# EAGLE board AM3352-SOM-EVB_Rev_D Kopie (EAGLE 7.2.0)
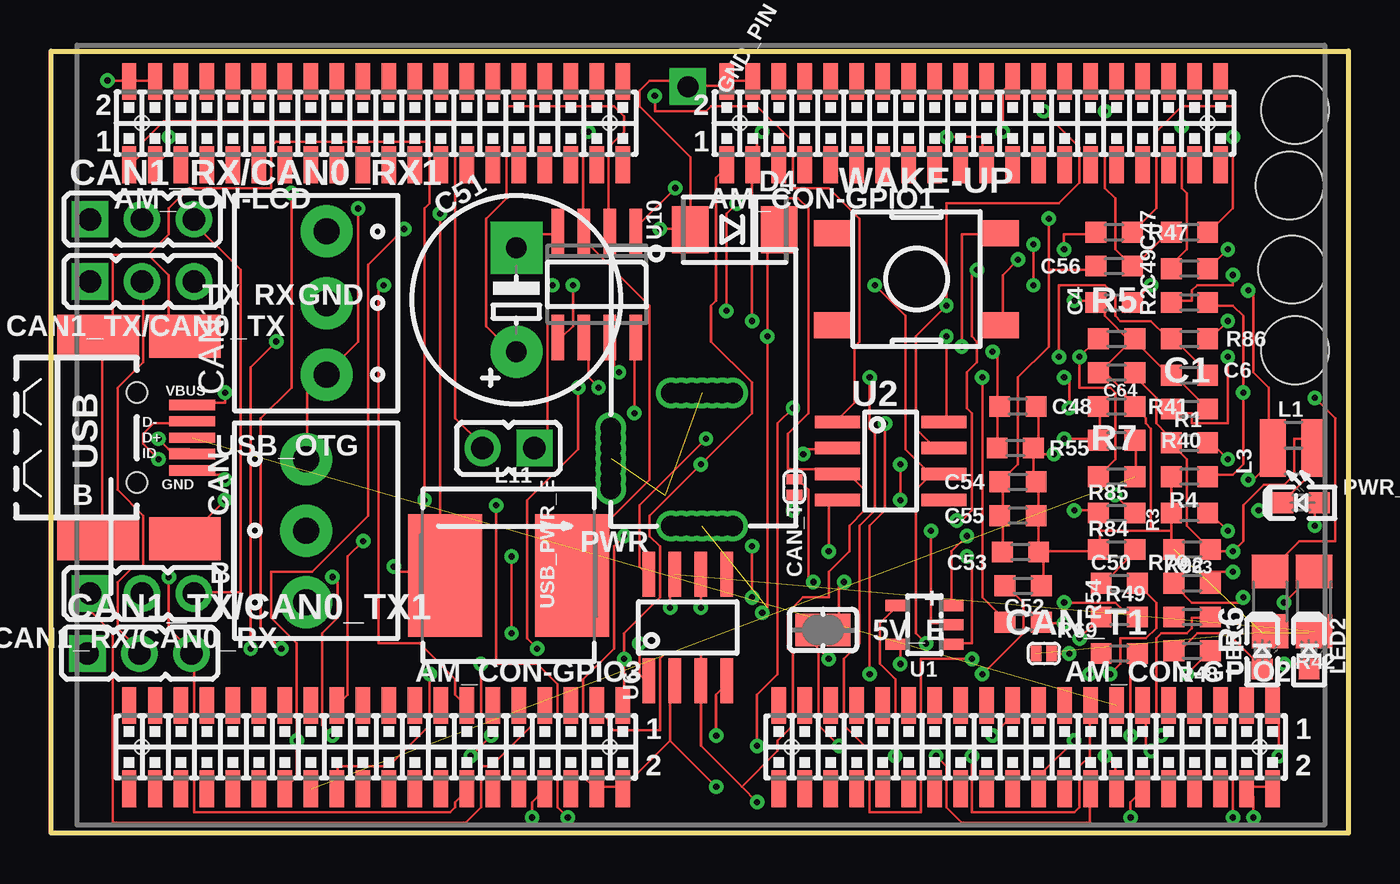
[diagram p0: board, top side]
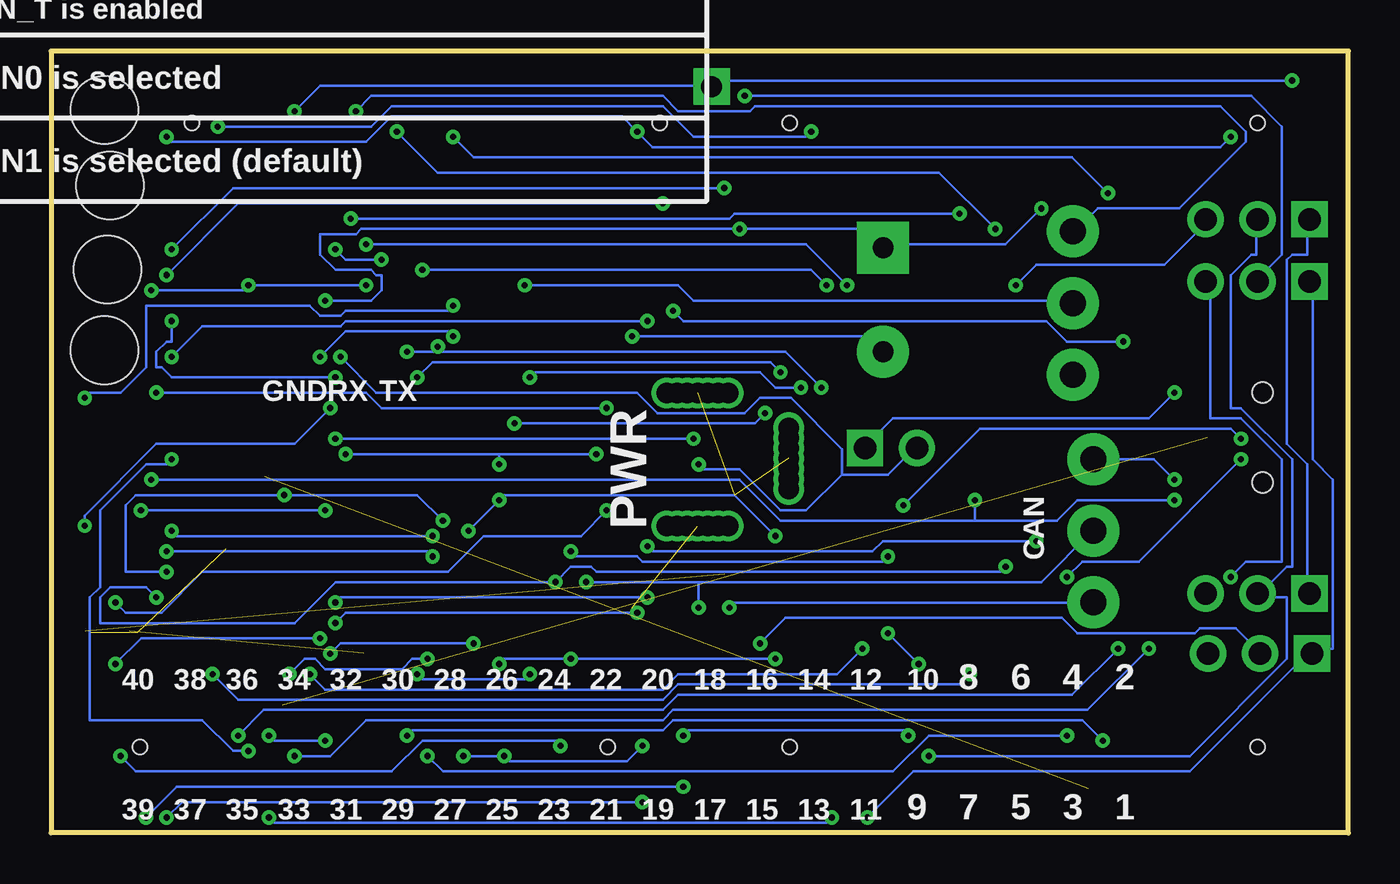
[diagram p1: board, bottom side, seen from below]

Size 63.39 x 38.18 mm. Coordinates in mm from the lower left corner, seen from the top.
Outline: 0,0 63.39,0 63.39,38.18 0,38.18 0,0
Copper layers (1+16): Top 0.035mm / dielectric 1.5mm / Bottom 0.035mm
Design rules "default": minimum track width 5mil, minimum drill 0.3mm, track to track 5mil, track to pad 5mil, pad to pad 5mil, via to via 5mil, smd to smd 1mil, copper to edge 10mil, drill to drill 8mil, minimum pad ring 8mil, minimum via ring 8mil, stop-mask expansion 4mil, vias tented up to drill 25mil, thermal gap 20mil
Net classes: 2 lan_sh: clearance 0.762 mm
Holes 3.3 mm at 60.78,23.57 60.65,27.51 60.52,31.63 60.78,35.31

## Footprints (pad centres in the part's own frame; a part is rotated, then mirrored left to right if it is on the bottom)
SJ-CLOSE = smd 1.168 x 1.6: 1 -0.762,0; 2 0.762,0
AM3352-SOM-EVB = smd 0.7 x 1.8: 1-1 -27.94,13.208; 1-2 -27.94,17.272; 1-3 -26.67,13.208; 1-4 -26.67,17.272; 1-5 -25.4,13.208; 1-6 -25.4,17.272; 1-7 -24.13,13.208; 1-8 -24.13,17.272; 1-9 -22.86,13.208; 1-10 -22.86,17.272; 1-11 -21.59,13.208; 1-12 -21.59,17.272; 1-13 -20.32,13.208; 1-14 -20.32,17.272; 1-15 -19.05,13.208; 1-16 -19.05,17.272; 1-17 -17.78,13.208; 1-18 -17.78,17.272; 1-19 -16.51,13.208; 1-20 -16.51,17.272; 1-21 -15.24,13.208; 1-22 -15.24,17.272; 1-23 -13.97,13.208; 1-24 -13.97,17.272; 1-25 -12.7,13.208; 1-26 -12.7,17.272; 1-27 -11.43,13.208; 1-28 -11.43,17.272; 1-29 -10.16,13.208; 1-30 -10.16,17.272; 1-31 -8.89,13.208; 1-32 -8.89,17.272; 1-33 -7.62,13.208; 1-34 -7.62,17.272; 1-35 -6.35,13.208; 1-36 -6.35,17.272; 1-37 -5.08,13.208; 1-38 -5.08,17.272; 1-39 -3.81,13.208; 1-40 -3.81,17.272; 2-1 1.27,13.208; 2-2 1.27,17.272; 2-3 2.54,13.208; 2-4 2.54,17.272; 2-5 3.81,13.208; 2-6 3.81,17.272; 2-7 5.08,13.208; 2-8 5.08,17.272; 2-9 6.35,13.208; 2-10 6.35,17.272; 2-11 7.62,13.208; 2-12 7.62,17.272; 2-13 8.89,13.208; 2-14 8.89,17.272; 2-15 10.16,13.208; 2-16 10.16,17.272; 2-17 11.43,13.208; 2-18 11.43,17.272; 2-19 12.7,13.208; 2-20 12.7,17.272; 2-21 13.97,13.208; 2-22 13.97,17.272; 2-23 15.24,13.208; 2-24 15.24,17.272; 2-25 16.51,13.208; 2-26 16.51,17.272; 2-27 17.78,13.208; 2-28 17.78,17.272; 2-29 19.05,13.208; 2-30 19.05,17.272; 2-31 20.32,13.208; 2-32 20.32,17.272; 2-33 21.59,13.208; 2-34 21.59,17.272; 2-35 22.86,13.208; 2-36 22.86,17.272; 2-37 24.13,13.208; 2-38 24.13,17.272; 2-39 25.4,13.208; 2-40 25.4,17.272; 3-1 27.94,-13.208; 3-2 27.94,-17.272; 3-3 26.67,-13.208; 3-4 26.67,-17.272; 3-5 25.4,-13.208; 3-6 25.4,-17.272; 3-7 24.13,-13.208; 3-8 24.13,-17.272; 3-9 22.86,-13.208; 3-10 22.86,-17.272; 3-11 21.59,-13.208; 3-12 21.59,-17.272; 3-13 20.32,-13.208; 3-14 20.32,-17.272; 3-15 19.05,-13.208; 3-16 19.05,-17.272; 3-17 17.78,-13.208; 3-18 17.78,-17.272; 3-19 16.51,-13.208; 3-20 16.51,-17.272; 3-21 15.24,-13.208; 3-22 15.24,-17.272; 3-23 13.97,-13.208; 3-24 13.97,-17.272; 3-25 12.7,-13.208; 3-26 12.7,-17.272; 3-27 11.43,-13.208; 3-28 11.43,-17.272; 3-29 10.16,-13.208; 3-30 10.16,-17.272; 3-31 8.89,-13.208; 3-32 8.89,-17.272; 3-33 7.62,-13.208; 3-34 7.62,-17.272; 3-35 6.35,-13.208; 3-36 6.35,-17.272; 3-37 5.08,-13.208; 3-38 5.08,-17.272; 3-39 3.81,-13.208; 3-40 3.81,-17.272; 4-1 -3.81,-13.208; 4-2 -3.81,-17.272; 4-3 -5.08,-13.208; 4-4 -5.08,-17.272; 4-5 -6.35,-13.208; 4-6 -6.35,-17.272; 4-7 -7.62,-13.208; 4-8 -7.62,-17.272; 4-9 -8.89,-13.208; 4-10 -8.89,-17.272; 4-11 -10.16,-13.208; 4-12 -10.16,-17.272; 4-13 -11.43,-13.208; 4-14 -11.43,-17.272; 4-15 -12.7,-13.208; 4-16 -12.7,-17.272; 4-17 -13.97,-13.208; 4-18 -13.97,-17.272; 4-19 -15.24,-13.208; 4-20 -15.24,-17.272; 4-21 -16.51,-13.208; 4-22 -16.51,-17.272; 4-23 -17.78,-13.208; 4-24 -17.78,-17.272; 4-25 -19.05,-13.208; 4-26 -19.05,-17.272; 4-27 -20.32,-13.208; 4-28 -20.32,-17.272; 4-29 -21.59,-13.208; 4-30 -21.59,-17.272; 4-31 -22.86,-13.208; 4-32 -22.86,-17.272; 4-33 -24.13,-13.208; 4-34 -24.13,-17.272; 4-35 -25.4,-13.208; 4-36 -25.4,-17.272; 4-37 -26.67,-13.208; 4-38 -26.67,-17.272; 4-39 -27.94,-13.208; 4-40 -27.94,-17.272 | hole 0.7: -27.305,15.24; -4.445,15.24; 1.905,15.24; 24.765,15.24; 27.305,-15.24; 4.445,-15.24; -4.445,-15.24; -27.305,-15.24
C0603_DWS = smd 1.016 x 1.016: 1 -0.889,0; 2 0.889,0
E5-10,5 = drill 1.016 pad 2.54: + -2.54,0 | drill 1.016 pad 2.54 square: - 2.54,0
CON3/3.5MM = drill 1.27 pad 2.54: 1 -1.75,-0.5; 2 1.75,-0.5; 3 5.25,-0.5
JP2 = drill 1.1 pad 1.778 square: 1 -2.54,0 | drill 1.1 pad 1.778: 2 0,0; 3 2.54,0
SJ_1_SMALLER = smd 0.508 x 0.762: 1 -0.381,0; 2 0.381,0
DO214AA = smd 1.778 x 2.286: A 2.177,0; C -2.177,0
FIDUCIAL-1X3 = smd 1 x 1: 1 0,0
TEST_PAD40/70/SQUARE = drill 1.016 pad 1.778 square: P$1 0,0
L0805_5MIL_DWS = smd 1.27 x 1.524: 1 -1.016,0; 2 1.016,0
8X8MM_3131 = smd 3.6 x 6: 1 -3.1,0; 2 3.1,0
LED_0603 = smd 1.016 x 1.016: A 0.889,0; C -0.889,0
PWR_JACK_UNI_MILLING = drill 1: + 0,4.75; +1 0,5.25; +2 0,5.75; +3 0,6.25; +4 0,4.25; +5 0,3.75; +6 0,3.25; - -6.5,4.75; -1 -6.5,5.25; -2 -6.5,5.75; -3 -6.5,4.25; -4 -6.5,3.75; -5 -6.5,6.25; -6 -6.5,3.25; -- -3.3,0.3; --1 -3.8,0.3; --2 -4.3,0.3; --3 -4.8,0.3; --4 -2.8,0.3; --5 -2.3,0.3; --6 -1.8,0.3
LED-0603 = smd 1.016 x 1.016: A 0.889,0; C -0.889,0
R0603_5MIL_DWS = smd 1.016 x 1.016: 1 -0.889,0; 2 0.889,0
R1206_5MIL_WS = smd 1.651 x 1.778: 1 -1.46,0; 2 1.46,0
SOT23-5 = smd 1.2 x 0.55: 1 1.3,-0.95; 2 1.3,0; 3 1.3,0.95; 4 -1.3,0.95; 5 -1.3,-0.95
SO-08 = smd 0.6 x 2.2: 1 -1.905,-2.6; 2 -0.635,-2.6; 3 0.635,-2.6; 4 1.905,-2.6; 5 1.905,2.6; 6 0.635,2.6; 7 -0.635,2.6; 8 -1.905,2.6
SOIC8 = smd 0.6 x 2.2: 1 -1.905,-2.6; 2 -0.635,-2.6; 3 0.635,-2.6; 4 1.905,-2.6; 5 1.905,2.6; 6 0.635,2.6; 7 -0.635,2.6; 8 -1.905,2.6
USB_MINI_9PIN = smd 2.25 x 0.5: D+ 2.706,0; D- 2.706,0.8; GND 2.706,-1.6; ID 2.706,-0.8; VBUS 2.706,1.6 | smd 4 x 2.1: GND1 -1.9,4.95; GND3 -1.9,-4.95 | smd 3.5 x 2.1: GND2 2.35,4.95; GND4 2.35,-4.95 | hole 1: 0,2.2; 0,-2.2
JP1 = drill 1.1 pad 1.778 square: 1 0,-1.27 | drill 1.1 pad 1.778: 2 0,1.27
T1157 = smd 1.27 x 1.905: 1 -2.25,4.054; 2 2.25,4.054; 3 2.25,-4.054; 4 -2.25,-4.054

## Placement (x,y rotation side)
5V_E  Close  [SJ-CLOSE]  37.72,9.91 180 top
AM3352-SOM-EVB-PLATFORM  4XGPH127SMT-02X20(PA-V16X-2X20-LF)  [AM3352-SOM-EVB]  31.75,19.43 0 top
C1  100nF  [C0603_DWS]  55.63,20.7 0 top
C4  100nF  [C0603_DWS]  51.94,25.91 180 top
C6  100nF  [C0603_DWS]  55.63,22.35 180 top
C47  100nF  [C0603_DWS]  55.63,29.34 180 top
C48  100nF  [C0603_DWS]  47.24,20.83 0 top
C49  10nF  [C0603_DWS]  55.63,27.56 180 top
C50  3.3nF  [C0603_DWS]  52.2,12.19 180 top
C51  470uF/25V/LOWESR/105C  [E5-10,5]  22.73,26.04 90 top
C52  100nF  [C0603_DWS]  47.5,12.06 0 top
C53  22uF/6.3V  [C0603_DWS]  47.37,13.72 0 top
C54  22uF/6.3V  [C0603_DWS]  47.24,17.14 0 top
C55  22uF/6.3V  [C0603_DWS]  47.24,15.49 0 top
C56  22uF/6.3V  [C0603_DWS]  51.94,27.69 0 top
C63  22uF/6.3V  [C0603_DWS]  55.75,13.84 180 top
C64  22uF/6.3V  [C0603_DWS]  52.07,22.48 180 top
CAN  TB3-3.5mm  [CON3/3.5MM]  12.95,16.51 270 top
CAN1  TB3-3.5mm  [CON3/3.5MM]  12.95,24.13 90 top
CAN1_RX/CAN0_RX  HN1x3(CAN1_RX:Close/CAN0_RX:Open)  [JP2]  4.45,11.68 0 top
CAN1_RX/CAN0_RX1  HN1x3(CAN1_RX:Close/CAN0_RX:Open)  [JP2]  4.45,29.97 0 top
CAN1_TX/CAN0_TX  HN1x3(CAN1_TX:Close/CAN0_TX:Open)  [JP2]  4.45,26.92 0 top
CAN1_TX/CAN0_TX1  HN1x3(CAN1_TX:Close/CAN0_TX:Open)  [JP2]  4.32,8.76 0 top
CAN_T  Open  [SJ_1_SMALLER]  36.32,16.89 90 top
CAN_T1  Open  [SJ_1_SMALLER]  48.51,8.76 0 top
D4  SMBJ16A  [DO214AA]  33.4,29.46 180 top
FID1  FIDUCIAL  [FIDUCIAL-1X3]  60.58,31.62 180 top
FID2  FIDUCIAL  [FIDUCIAL-1X3]  60.58,35.31 180 top
FID3  FIDUCIAL  [FIDUCIAL-1X3]  60.71,27.3 180 top
GND_PIN  TESTPAD3  [TEST_PAD40/70/SQUARE]  31.11,36.45 180 top
L1  FB0805/600R/2A  [L0805_5MIL_DWS]  60.71,19.43 0 top
L3  FB0805/600R/200mA(201209-601)  [L0805_5MIL_DWS]  60.71,18.16 180 top
L11  10uH/3.15A/20%  [8X8MM_3131]  22.35,12.57 180 top
LED2  LED/Red/0603  [LED_0603]  61.47,8.89 270 top
LED3  LED/Yellow/0603  [LED_0603]  59.18,8.89 270 top
PWR  YDJ-1136  [PWR_JACK_UNI_MILLING]  27.05,14.99 270 top
PWR_LED  LED/Red/0603  [LED-0603]  61.09,16.13 0 top
R1  2.2k/1%  [R0603_5MIL_DWS]  55.63,19.05 180 top
R2  NA  [R0603_5MIL_DWS]  55.63,25.91 180 top
R3  13k/1%  [R0603_5MIL_DWS]  55.63,15.62 0 top
R4  10k  [R0603_5MIL_DWS]  55.63,17.4 0 top
R5  10k  [R0603_5MIL_DWS]  52.07,24.13 0 top
R6  120R  [R1206_5MIL_WS]  59.56,11.3 90 top
R7  NA  [R0603_5MIL_DWS]  52.07,17.4 0 top
R40  NA  [R0603_5MIL_DWS]  52.07,19.18 0 top
R41  10k  [R0603_5MIL_DWS]  52.07,20.83 0 top
R42  120R  [R1206_5MIL_WS]  61.72,11.3 270 top
R47  2.2k/1%  [R0603_5MIL_DWS]  51.94,29.34 0 top
R48  2.2k/1%  [R0603_5MIL_DWS]  55.75,8.89 180 top
R49  2.2k/1%  [R0603_5MIL_DWS]  52.2,10.54 180 top
R54  49.9R/1%  [R0603_5MIL_DWS]  52.2,8.76 180 top
R55  NA  [R0603_5MIL_DWS]  47.12,18.8 0 top
R69  10k  [R0603_5MIL_DWS]  47.5,10.29 180 top
R70  4.99k/1%  [R0603_5MIL_DWS]  55.75,12.19 180 top
R84  2.2k/1%  [R0603_5MIL_DWS]  52.07,13.84 180 top
R85  1.05k/1%  [R0603_5MIL_DWS]  52.07,15.62 180 top
R86  2.2k/1%  [R0603_5MIL_DWS]  55.63,24.13 0 top
R92  0R  [R0603_5MIL_DWS]  55.75,10.54 0 top
U1  SY6280  [SOT23-5]  42.67,10.16 0 top
U2  SN65HVD230(SO8)  [SO-08]  41.02,18.16 270 top
U6  SN65HVD230(SO8)  [SO-08]  31.11,10.03 0 top
U10  MP1482DS  [SOIC8]  26.67,26.8 180 top
USB_OTG  USB-OTG  [USB_MINI_9PIN]  4.19,19.3 0 top
USB_PWR_E  HN1x2(Open)  [JP1]  22.35,18.8 90 top
WAKE-UP  T1157  [T1157]  42.29,27.05 270 top

## Library data of the parts
5V_E CAN1_RX/CAN0_RX CAN1_RX/CAN0_RX1 CAN1_TX/CAN0_TX CAN1_TX/CAN0_TX1 CAN_T CAN_T1 USB_PWR_E = jumper
AM3352-SOM-EVB-PLATFORM = OLIMEX_CASES
C1 C4 C6 C47-C56 C63 C64 L1 L3 R1-R7 R40-R42 R47-R49 R54 R55 R69 R70 R84-R86 R92 = rcl
CAN CAN1 LED2 LED3 PWR_LED = DOUBLE-SIDE
D4 L11 = OLIMEX_DISCRET
FID1-FID3 = SparkFunEagle-6-6-07
GND_PIN PWR WAKE-UP = gogo
U1 U10 = OLIMEX_IC
U2 U6 = arm
USB_OTG = OLIMEX_CONNECTORS

## Nets
+5V: 5V_E.2 AM3352-SOM-EVB-PLATFORM.1-1 AM3352-SOM-EVB-PLATFORM.2-1 AM3352-SOM-EVB-PLATFORM.3-1 AM3352-SOM-EVB-PLATFORM.4-1 C6.1 R86.1 U1.5 USB_PWR_E.2
+5V_OTG_PWR: C4.1 L1.1 USB_OTG.VBUS USB_PWR_E.1
AIN4: AM3352-SOM-EVB-PLATFORM.4-35
AIN5: AM3352-SOM-EVB-PLATFORM.4-37
AIN6: AM3352-SOM-EVB-PLATFORM.4-38
AIN7: AM3352-SOM-EVB-PLATFORM.4-36
CAN_RX: CAN1_RX/CAN0_RX1.2 CAN1_RX/CAN0_RX.2 U2.4 U6.4
CAN_TX: CAN1_TX/CAN0_TX1.2 CAN1_TX/CAN0_TX.2 U2.1 U6.1
CANH: CAN.3 R42.2 U6.7
CANH1: CAN1.3 R6.2 U2.7
CANL: CAN.2 CAN_T.2 U6.6
CANL1: CAN1.2 CAN_T1.2 U2.6
EXT_WAKEUP: AM3352-SOM-EVB-PLATFORM.3-20 R54.1
GND [PWR]: AM3352-SOM-EVB-PLATFORM.1-2 AM3352-SOM-EVB-PLATFORM.1-4 AM3352-SOM-EVB-PLATFORM.2-2 AM3352-SOM-EVB-PLATFORM.2-4 AM3352-SOM-EVB-PLATFORM.3-2 AM3352-SOM-EVB-PLATFORM.3-4 AM3352-SOM-EVB-PLATFORM.4-2 AM3352-SOM-EVB-PLATFORM.4-4 C1.2 C4.2 C6.2 C47.2 C48.2 C51.- C52.2 C53.2 C54.2 C55.2 C56.2 C63.2 C64.2 CAN1.1 CAN.1 D4.A GND_PIN.P$1 L3.1 LED2.C LED3.C PWR.- PWR.-- PWR_LED.C R3.1 R4.1 R5.2 R41.2 R55.2 R84.2 R85.2 U1.2 U2.2 U6.2 U10.4 USB_OTG.GND
GNDA: AM3352-SOM-EVB-PLATFORM.4-40
JTAG_TCK: AM3352-SOM-EVB-PLATFORM.4-29
JTAG_TDI: AM3352-SOM-EVB-PLATFORM.4-31
JTAG_TDO: AM3352-SOM-EVB-PLATFORM.4-33
JTAG_TMS: AM3352-SOM-EVB-PLATFORM.4-32
JTAG_TRST: AM3352-SOM-EVB-PLATFORM.4-30
LCD_BKL: AM3352-SOM-EVB-PLATFORM.1-36
LCD_LEFT/RIGHT: AM3352-SOM-EVB-PLATFORM.1-33
LCD_UP/DOWN: AM3352-SOM-EVB-PLATFORM.1-34
MMC0-SDCD#/EMU4: AM3352-SOM-EVB-PLATFORM.3-17
N$1: LED2.A R49.2
N$2: CAN_T1.1 R6.1
N$3: C51.+ D4.C PWR.+ R69.1 U10.2
N$4: C52.1 U10.8
N$5: R5.1 R7.1 U2.8
N$6: R69.2 U10.7
N$7: C49.1 U10.1
N$8: C49.2 L11.1 U10.3
N$9: C50.1 U10.6
N$11: C50.2 R84.1
N$12 [PWR]: 5V_E.1 C53.1 C54.1 C55.1 C56.1 L11.2 R70.2
N$13: AM3352-SOM-EVB-PLATFORM.2-21 R92.2
N$43: R47.1 WAKE-UP.2
N$44: C48.1 R54.2 R55.1 WAKE-UP.1
N$62: R70.1 R85.1 U10.5
N$80: R40.1 R41.1 U6.8
N$99: R3.2 U1.3
N$100: C63.1 C64.1 L1.2 R1.2 U1.1
N$129: PWR_LED.A R86.2
N$231: LED3.A R48.2
N$266: L3.2 USB_OTG.GND1 USB_OTG.GND2 USB_OTG.GND3 USB_OTG.GND4
N$566: CAN_T.1 R42.1
NNMI: AM3352-SOM-EVB-PLATFORM.3-22
P0_0/EMDIO: AM3352-SOM-EVB-PLATFORM.3-38
P0_1/EMDC: AM3352-SOM-EVB-PLATFORM.3-36
P0_2/SPI0_SCLK: AM3352-SOM-EVB-PLATFORM.4-11
P0_3/SPI0_D0(MISO): AM3352-SOM-EVB-PLATFORM.4-9
P0_4/SPI0_D1(MOSI): AM3352-SOM-EVB-PLATFORM.4-10
P0_5/SPI0_CS0: AM3352-SOM-EVB-PLATFORM.4-12
P0_7/PWM0_OUT: AM3352-SOM-EVB-PLATFORM.4-27
P0_8/LCD_D12: AM3352-SOM-EVB-PLATFORM.1-25
P0_9/LCD_D13: AM3352-SOM-EVB-PLATFORM.1-26
P0_10/LCD_D14: AM3352-SOM-EVB-PLATFORM.1-27
P0_11/LCD_D15: AM3352-SOM-EVB-PLATFORM.1-28
P0_12/I2C2_SDA: AM3352-SOM-EVB-PLATFORM.4-8 CAN1_TX/CAN0_TX1.1 CAN1_TX/CAN0_TX.1
P0_13/I2C2_SCL: AM3352-SOM-EVB-PLATFORM.4-7 CAN1_RX/CAN0_RX1.1 CAN1_RX/CAN0_RX.1
P0_14/UART1_RXD: AM3352-SOM-EVB-PLATFORM.4-6
P0_15/UART1_TXD: AM3352-SOM-EVB-PLATFORM.4-5
P0_16/ETXD3: AM3352-SOM-EVB-PLATFORM.3-29
P0_17/ETXD2: AM3352-SOM-EVB-PLATFORM.3-27
P0_19/EMU2: AM3352-SOM-EVB-PLATFORM.2-25
P0_20/EMU3: AM3352-SOM-EVB-PLATFORM.4-22
P0_21/ETXD1: AM3352-SOM-EVB-PLATFORM.3-25
P0_22/LCD_D23: AM3352-SOM-EVB-PLATFORM.1-21
P0_23/LCD_D22: AM3352-SOM-EVB-PLATFORM.1-13
P0_26/LCD_D21: AM3352-SOM-EVB-PLATFORM.1-5
P0_27/LCD_D20: AM3352-SOM-EVB-PLATFORM.1-22
P0_28/ETXD0: AM3352-SOM-EVB-PLATFORM.3-23
P0_29/EPHY-RST#/RFCLK: AM3352-SOM-EVB-PLATFORM.3-40
P0_30/NRB0/CRS: R92.1
P0_31/NWP/RXERR: AM3352-SOM-EVB-PLATFORM.2-32
P1_0/NDQ0: AM3352-SOM-EVB-PLATFORM.2-22
P1_1/NDQ1: AM3352-SOM-EVB-PLATFORM.2-20
P1_2/NDQ2: AM3352-SOM-EVB-PLATFORM.2-18
P1_3/NDQ3: AM3352-SOM-EVB-PLATFORM.2-16
P1_4/NDQ4: AM3352-SOM-EVB-PLATFORM.2-14
P1_5/NDQ5: AM3352-SOM-EVB-PLATFORM.2-12
P1_6/NDQ6: AM3352-SOM-EVB-PLATFORM.2-10
P1_7/NDQ7: AM3352-SOM-EVB-PLATFORM.2-8
P1_8/UART4_RXD: AM3352-SOM-EVB-PLATFORM.4-14 CAN1_TX/CAN0_TX1.3 CAN1_TX/CAN0_TX.3
P1_9/UART4_TXD: AM3352-SOM-EVB-PLATFORM.4-13 CAN1_RX/CAN0_RX1.3 CAN1_RX/CAN0_RX.3
P1_10/UART0_RX: AM3352-SOM-EVB-PLATFORM.2-5
P1_11/UART0_TX: AM3352-SOM-EVB-PLATFORM.2-7
P1_12/LCD_D19: AM3352-SOM-EVB-PLATFORM.1-14
P1_13/LCD_D18: AM3352-SOM-EVB-PLATFORM.1-6
P1_14/LCD_D17: AM3352-SOM-EVB-PLATFORM.1-23
P1_15/LCD_D16: AM3352-SOM-EVB-PLATFORM.1-7
P1_16/TXEN: AM3352-SOM-EVB-PLATFORM.2-30
P1_17/RXDV [PWR]: AM3352-SOM-EVB-PLATFORM.2-40
P1_18/EHRPWM1A/TXD3: AM3352-SOM-EVB-PLATFORM.2-38
P1_19/TXD2: AM3352-SOM-EVB-PLATFORM.2-36
P1_20/TXD1: AM3352-SOM-EVB-PLATFORM.2-34
P1_21/TXD0: AM3352-SOM-EVB-PLATFORM.2-39
P1_22/TXCLK: AM3352-SOM-EVB-PLATFORM.2-37
P1_23/RXCLK: AM3352-SOM-EVB-PLATFORM.2-35
P1_24/RXD3: AM3352-SOM-EVB-PLATFORM.2-33
P1_25/RXD2: AM3352-SOM-EVB-PLATFORM.2-29
P1_26/RXD1: AM3352-SOM-EVB-PLATFORM.2-31
P1_27/RXD0: AM3352-SOM-EVB-PLATFORM.2-27
P1_28/ECOL: AM3352-SOM-EVB-PLATFORM.2-23
P1_29/NCE0: AM3352-SOM-EVB-PLATFORM.2-17
P1_30/NCE1/LCD_U/D: AM3352-SOM-EVB-PLATFORM.2-15
P1_31/NDQS: AM3352-SOM-EVB-PLATFORM.2-6
P2_0/LCD_L/R: AM3352-SOM-EVB-PLATFORM.2-26
P2_1/NRB1: AM3352-SOM-EVB-PLATFORM.2-28
P2_2/NALE: AM3352-SOM-EVB-PLATFORM.2-11
P2_3/NRE: AM3352-SOM-EVB-PLATFORM.2-19
P2_4/NWE: AM3352-SOM-EVB-PLATFORM.2-9
P2_5/NCLE: AM3352-SOM-EVB-PLATFORM.2-13
P2_6/LCD_D0: AM3352-SOM-EVB-PLATFORM.1-8
P2_7/LCD_D1: AM3352-SOM-EVB-PLATFORM.1-9
P2_8/LCD_D2: AM3352-SOM-EVB-PLATFORM.1-10
P2_9/LCD_D3: AM3352-SOM-EVB-PLATFORM.1-11
P2_10/LCD_D4: AM3352-SOM-EVB-PLATFORM.1-12
P2_11/LCD_D5: AM3352-SOM-EVB-PLATFORM.1-15
P2_12/LCD_D6: AM3352-SOM-EVB-PLATFORM.1-16
P2_13/LCD_D7: AM3352-SOM-EVB-PLATFORM.1-17
P2_14/LCD_D8: AM3352-SOM-EVB-PLATFORM.1-18
P2_15/LCD_D9: AM3352-SOM-EVB-PLATFORM.1-19
P2_16/LCD_D10: AM3352-SOM-EVB-PLATFORM.1-20
P2_17/LCD_D11: AM3352-SOM-EVB-PLATFORM.1-24
P2_18/ERXD3: AM3352-SOM-EVB-PLATFORM.3-30
P2_19/ERXD2: AM3352-SOM-EVB-PLATFORM.3-28
P2_20/ERXD1: AM3352-SOM-EVB-PLATFORM.3-26
P2_21/ERXD0: AM3352-SOM-EVB-PLATFORM.3-24
P2_22/LCD_VSYNC: AM3352-SOM-EVB-PLATFORM.1-30
P2_23/LCD_HSYNC: AM3352-SOM-EVB-PLATFORM.1-29
P2_24/LCD_CLK: AM3352-SOM-EVB-PLATFORM.1-31
P2_25/LCD_DE: AM3352-SOM-EVB-PLATFORM.1-32
P3_0/ECOL: AM3352-SOM-EVB-PLATFORM.3-37
P3_1/ECRS: AM3352-SOM-EVB-PLATFORM.3-39
P3_2/ERXERR: AM3352-SOM-EVB-PLATFORM.3-35
P3_3/ETXEN: AM3352-SOM-EVB-PLATFORM.3-31
P3_4/ERXDV: AM3352-SOM-EVB-PLATFORM.3-32
P3_5/I2C0-SDA: AM3352-SOM-EVB-PLATFORM.4-16
P3_6/I2C0-SCL: AM3352-SOM-EVB-PLATFORM.4-15
P3_7/EMU0 [PWR]: AM3352-SOM-EVB-PLATFORM.4-25
P3_8/EMU1: AM3352-SOM-EVB-PLATFORM.4-26 R7.2 R40.2
P3_9/ETXCK: AM3352-SOM-EVB-PLATFORM.3-33
P3_10/ERXCK: AM3352-SOM-EVB-PLATFORM.3-34
P3_14/SPI1_CLK: AM3352-SOM-EVB-PLATFORM.4-19
P3_15/SPI1_D0(MISO): AM3352-SOM-EVB-PLATFORM.4-17
P3_16/SPI1_D1(MOSI): AM3352-SOM-EVB-PLATFORM.4-18
P3_17/SPI1_CS0: AM3352-SOM-EVB-PLATFORM.4-20
P3_18/LED1: AM3352-SOM-EVB-PLATFORM.4-21
P3_19/LCD_PWR_EN: AM3352-SOM-EVB-PLATFORM.1-35
P3_20/LED2: AM3352-SOM-EVB-PLATFORM.4-23 R49.1
P3_21/LED3: AM3352-SOM-EVB-PLATFORM.4-24 R48.1
PMIC_POWER_EN: AM3352-SOM-EVB-PLATFORM.3-18
SYS_RESETN: AM3352-SOM-EVB-PLATFORM.2-24 AM3352-SOM-EVB-PLATFORM.3-21 AM3352-SOM-EVB-PLATFORM.4-28
TPX1: AM3352-SOM-EVB-PLATFORM.1-37
TPX2: AM3352-SOM-EVB-PLATFORM.1-38
TPY1: AM3352-SOM-EVB-PLATFORM.1-39
TPY2: AM3352-SOM-EVB-PLATFORM.1-40
USB0-DRV: AM3352-SOM-EVB-PLATFORM.3-16 R2.1 R4.2 U1.4
USB0-ID: AM3352-SOM-EVB-PLATFORM.3-12 USB_OTG.ID
USB0-VBUS: AM3352-SOM-EVB-PLATFORM.3-11 R1.1
USB0_CE: AM3352-SOM-EVB-PLATFORM.3-14 R2.2
USB0_DM: AM3352-SOM-EVB-PLATFORM.3-15 USB_OTG.D-
USB0_DP: AM3352-SOM-EVB-PLATFORM.3-13 USB_OTG.D+
USB1-VBUS: AM3352-SOM-EVB-PLATFORM.3-5
USB1_CE: AM3352-SOM-EVB-PLATFORM.3-8
USB1_DM: AM3352-SOM-EVB-PLATFORM.3-9
USB1_DP: AM3352-SOM-EVB-PLATFORM.3-7
USB1_DRV: AM3352-SOM-EVB-PLATFORM.3-10
USB1_ID: AM3352-SOM-EVB-PLATFORM.3-6
VCC [PWR]: AM3352-SOM-EVB-PLATFORM.1-3 AM3352-SOM-EVB-PLATFORM.2-3 AM3352-SOM-EVB-PLATFORM.3-3 AM3352-SOM-EVB-PLATFORM.4-3 C1.1 C47.1 R47.2 U2.3 U6.3
VDDA_ADC: AM3352-SOM-EVB-PLATFORM.4-39
VREFP: AM3352-SOM-EVB-PLATFORM.4-34

## Tracks (layer width: path | path; a pad name or v marks a point on that pad's centre or on a via)
+5V  (via drill 0.3)
  Top 0.127: v41.5,8.25 41.5,9 U1.5 | 37.5,9 37,9.5 37,9.75 5V_E.2 | 37.5,9 v38,8.5 | AM3352-SOM-EVB-PLATFORM.4-1 28,6.25 v28,8.5 28,9.75 29.75,11.5 29.75,14 29.25,14.5 29.25,15.5 v31.75,18 34.25,20.5 34.25,22 32.25,24 32.25,25.75 32.5,26 32.5,32 33,32.5 AM3352-SOM-EVB-PLATFORM.2-1 | v60,3.75 60,5.75 59.75,6 AM3352-SOM-EVB-PLATFORM.3-1 | v38.5,4.25 37.5,5.25 37.5,9 | C6.1 56.5,22.5 54.75,24.25 R86.1 54.5,24.25 53.75,25 52.25,25 52,25.25 52,26.25 51.5,26.75 49.25,26.75 v49.25,23.25 | AM3352-SOM-EVB-PLATFORM.1-1 4,32.75 4.5,33.25 4.5,33.75 5.5,34.75 19.75,34.75 19.75,20.25 21,19 USB_PWR_E.2
  Bottom 0.127: v41.5,8.25 41.25,8.5 v38,8.5 v28,8.5 | v60,3.75 59.25,3 46.75,3 45.25,4.5 38.75,4.5 v38.5,4.25 | v49.25,23.25 47.5,21.5 34.75,21.5 33.75,20.5 29.5,20.5 28.75,21.25 27.25,21.25 24.75,18.75 24.75,17.5 | 24.75,17.5 22.5,17.5 21.25,18.75 USB_PWR_E.2 | v31.75,18 31.5,17.75 29.75,17.75 27.75,15.75 26.5,15.75 24.75,17.5
+5V_OTG_PWR  (via drill 0.3)
  Top 0.127: v53.75,26.75 53,26 C4.1 | v58.5,26.5 58.75,26.25 58.75,22.5 59.5,21.75 59.5,19.5 L1.1 | v8.5,21.5 8.5,21 7,21 USB_OTG.VBUS | v48,28.75 v48,26.75 | v24.5,26.75 24.25,26.5 24.25,19.5 23.75,19 USB_PWR_E.1
  Bottom 0.127: v58.5,26.5 54,26.5 v53.75,26.75 v48,26.75 | v8.5,21.5 9.75,20.25 22.25,20.25 23.5,19 USB_PWR_E.1 | v48,28.75 26.5,28.75 v24.5,26.75
CAN_RX  (via drill 0.3)
  Top 0.127: v32.5,4.75 32.5,6.75 33,7.25 U6.4 | v20.5,3.75 21,4.25 | 21,4.25 v21.5,4.75 | v38,13.75 38,16 38.25,16.25 U2.4 | v22.5,9.75 v22.5,13.5 | 21,4.25 v21,8.25
  Bottom 0.127: v32.5,4.75 32.25,5 21.75,5 v21.5,4.75 | v20.5,3.75 7.75,3.75 3,8.5 3,11.5 4.25,11.5 CAN1_RX/CAN0_RX.2 4.25,11.75 3,13 2.75,13 2.75,18.25 5.25,20.75 5.75,20.75 5.75,27.25 4.75,28.25 4.5,28.25 4.5,29.75 CAN1_RX/CAN0_RX1.2 | v38,13.75 37.75,13.5 34.75,13.5 34.5,13.25 22.75,13.25 v22.5,13.5 | v21,8.25 v22.5,9.75
CAN_TX  (via drill 0.3)
  Top 0.127: v28.75,9.25 28.75,7.75 29,7.5 U6.1 | v29.5,36 29.5,35.25 32,35.25 32.25,35.5 34.5,35.5 36.25,33.75 36.25,31.5 38,31.5 39.5,30 39.5,24 39.25,23.75 39.25,21 38.5,20.25 U2.1 | CAN1_TX/CAN0_TX1.2 4.25,9 3.25,10 3.25,12.25 4,13 4.5,13 4.5,15.5 3.25,16.75 3.25,21.75 4.5,23 4.5,26.75 CAN1_TX/CAN0_TX.2
  Bottom 0.127: v28.75,9.25 27.5,10.5 14,10.5 13.25,9.75 7.5,9.75 7.25,10 5.5,10 4.5,9 CAN1_TX/CAN0_TX1.2 | v29.5,36 4.75,36 3.25,34.5 3.25,28.25 4.5,27 CAN1_TX/CAN0_TX.2
CANH  (via drill 0.3)  (1 unrouted)
  Top 0.127: v30.25,11 30.25,12.5 U6.7
  Bottom 0.127: v30.25,11 30,11.25 12.5,11.25 CAN.3
CANH1  (via drill 0.3)
  Top 0.127: v61.75,21.25 62.75,20.25 62.75,14.25 61,14.25 59.75,13 R6.2 | U2.7 43.5,19 43,19 42.25,19.75 42.25,24.25 v43.75,25.75 43.75,30.75 49.25,30.75 50.25,31.75 50.25,33.5 v48.5,35.25
  Bottom 0.127: v61.75,21.25 61.5,21.5 60,21.5 58.75,22.75 58.75,25.75 50.75,25.75 50.25,25.25 49.25,25.25 49,25.5 44,25.5 v43.75,25.75 | v48.5,35.25 47.75,36 33.5,36 32.75,35.25 29.25,35.25 29,35.5 6.25,35.5 5,34.25 5,33.75 8.25,30.5 12.25,30.5 13.25,29.5 CAN1.3
CANL  (via drill 0.3)
  Top 0.127: v37.25,12.25 37,12.5 37,16.75 36.5,17.25 CAN_T.2 | v31.75,11 U6.6
  Bottom 0.127: 31.75,12.25 15,12.25 12.5,14.75 CAN.2 | 31.75,12.25 v37.25,12.25 | 31.75,12.25 v31.75,11
CANL1  (via drill 0.3)
  Top 0.127: v49.75,8.75 49,8.75 CAN_T1.2 | v42.75,9.25 42.25,9.75 42.25,16.75 43,17.5 | 43,17.5 43.5,17.5 U2.6 43,17.5 | v40.25,26.75 41.75,25.25 41.75,18.75 43,17.5
  Bottom 0.127: v49.75,8.75 49.25,9.25 v42.75,9.25 | v40.25,26.75 32.75,26.75 32,26 13.5,26 CAN1.2
EXT_WAKEUP  (via drill 0.3)
  Top 0.127: v52.75,4.75 52.75,8.5 53,8.75 R54.1 | v50,4.5 48.5,3 48.5,2.25 AM3352-SOM-EVB-PLATFORM.3-20
  Bottom 0.127: v52.75,4.75 52.5,4.5 v50,4.5
GND  (via drill 0.3)  (4 unrouted)
  Top 0.127: 52.75,24 51.5,22.75 | 51.5,22.75 51.25,22.5 C64.2 51.5,22.75 | 52.75,24 51.5,25.25 51.5,25.5 51.25,25.75 C4.2 51,26 v50,26 | 52.75,24 R5.2 53,24 54.5,22.5 C6.2 54.75,22.5 56.5,20.75 C1.2 | 51.5,22.75 51.5,22.5 52.5,21.5 52.5,21.25 52.75,21 R41.2 53,20.75 53.5,20.25 53.5,20 53.75,19.75 53.75,14.75 | L3.1 61.5,18 61.5,17.5 60.25,16.25 PWR_LED.C 60,16 59,16 v59,15.75 | R4.1 54.75,17.25 54.75,15.75 R3.1 54.75,15.5 54.75,14.75 | 54.75,14.75 54.75,14 C63.2 | 51.25,14.75 51.25,15.5 R85.2 51,15.75 v50,15.75 | 51.25,14.75 51.25,14 R84.2 51,13.75 48.5,13.75 C53.2 | C53.2 48.5,13.5 48.5,12.25 C52.2 | 48,18.5 48,17.25 C54.2 48.25,17 48.25,15.5 C55.2 48.25,15.25 48.25,13.75 C53.2 | 48,18.5 48,18.75 R55.2 | C48.2 48.25,20.75 48.25,19 R55.2 | v36.75,18.5 36.75,18.75 38.25,18.75 U2.2 | 48,18.5 v49,18.5 | 48,18.5 R55.2 | 51.25,14.75 53.75,14.75 | 53.75,14.75 54.75,14.75 | AM3352-SOM-EVB-PLATFORM.3-2 59.5,2.25 58.5,2.25 AM3352-SOM-EVB-PLATFORM.3-4 58.5,2 58.75,1.75 v58.75,0.75 | v43,14.75 43,10.25 43.75,10.25 U1.2 | v28,14.5 27.5,14 27.5,9 26,7.5 26,2.75 26.5,2.25 AM3352-SOM-EVB-PLATFORM.4-4 26.75,2.25 27.75,2.25 AM3352-SOM-EVB-PLATFORM.4-2 28,2.25 30.25,4.5 | 30.25,4.5 30.25,7.25 U6.2 | 30.25,4.5 v32.5,2.25 | v41.5,16.25 v41.5,18 | v8.5,17.25 8.5,17.5 7,17.5 USB_OTG.GND | CAN.1 12.5,18.5 12.5,21.5 13.25,22.25 CAN1.1 13.5,22.5 15,24 v15,30.5 | U10.4 24.75,29.25 22.75,29.25 22.75,28.75 C51.- | AM3352-SOM-EVB-PLATFORM.2-4 34.25,36.75 33.25,36.75 AM3352-SOM-EVB-PLATFORM.2-2 33,36.5 31.25,36.5 GND_PIN.P$1 31,36.5 31,36.75 29.25,36.75 28.75,36.25 28.75,35.5 31.25,33 31.25,29.5 D4.A 31,29.5 v29.75,29.5
  Top 0.127: AM3352-SOM-EVB-PLATFORM.1-4 5,36.75 4,36.75 AM3352-SOM-EVB-PLATFORM.1-2 3.75,36.75 v2.75,36.75 | C47.2 54.5,29.25 53,27.75 C56.2 52.75,27.75 52,28.5 52,31 51.5,31.5 v51.5,35.25
  Bottom 0.127: v49,18.5 41.5,18.5 | 41.5,18.5 v36.75,18.5 | v50,15.75 v59,15.75 | v43,14.75 v41.5,16.25 41.25,16.5 30,16.5 v28,14.5 | v58.75,0.75 57.25,2.25 v32.5,2.25 | v41.5,18 41.5,18.5 | v8.5,17.25 9.5,18.25 12.25,18.25 CAN.1 | v51.5,35.25 50.25,36.5 31.25,36.5 GND_PIN.P$1 31,36.5 30.75,36.75 v2.75,36.75 | v15,30.5 16.75,28.75 22.5,28.75 C51.- 22.75,28.75 23.5,29.5 v29.75,29.5 48.25,29.5 48.5,29.25 50.25,29.25 50.25,28.25 49.5,27.5 47.75,27.5 47.5,27.25 47.25,27.25 47.25,26.5 47.75,26 v50,26
N$1  (via drill 0.3)
  Top 0.127: v60.25,8.25 61.25,8.25 LED2.A | v50.25,9.5 51.25,10.5 R49.2
  Bottom 0.127: v60.25,8.25 59,9.5 v50.25,9.5
N$2  (1 unrouted)
N$3  (via drill 0.3)  (1 unrouted)
  Top 0.127: U10.2 27.25,29.5 27.25,33.5 28,34.25 28,35 27.5,35.5 22.25,35.5 22.25,31 21.25,30 21.25,24.75 22.5,23.5 C51.+ | v49.5,10.25 48.5,10.25 R69.1 | v34.75,10.75 35,11 v35,24.25 35,28.75 35.5,29.25 D4.C
  Bottom 0.127: v49.5,10.25 49,10.75 v34.75,10.75 | v35,24.25 23.5,24.25 22.75,23.5 C51.+
N$4  (via drill 0.3)
  Top 0.127: v45.5,7.75 47.5,9.75 47.5,11.25 46.75,12 C52.1 | v40,7.75 40,15 40.75,15.75 v40.75,20 | v28.5,20.5 28.5,24 U10.8
  Bottom 0.127: v45.5,7.75 45.25,7.5 40.25,7.5 v40,7.75 | v40.75,20 29,20 v28.5,20.5
N$5  (via drill 0.3)
  Top 0.127: R7.1 51.25,17.5 52,18.25 52,21.5 51.75,21.75 50.25,21.75 v50.25,23.25 51,24 R5.1 | v43.75,24.25 43.75,20.25 U2.8
  Bottom 0.127: v43.75,24.25 44,24.5 49,24.5 v50.25,23.25
N$6  (via drill 0.3)
  Top 0.127: v45.5,22.25 45.5,11.5 46.5,10.5 R69.2 | v27.75,22.5 27.5,22.75 27.5,24 U10.7
  Bottom 0.127: v45.5,22.25 44.75,23 28.25,23 v27.75,22.5
N$7  (via drill 0.3)
  Top 0.127: v57.5,28.5 56.75,27.75 C49.1 | v30.5,31.5 28.75,29.75 28.75,29.5 U10.1
  Bottom 0.127: v57.5,28.5 54.5,31.5 v30.5,31.5
N$8  (via drill 0.3)
  Top 0.127: v55.25,34.5 55.25,31.5 55.5,31.25 55.5,28.5 54.75,27.75 C49.2 | v26.25,34.25 26,34 26,29.5 U10.3 26.25,29.25 26.25,28.75 29.25,25.75 29.25,17.25 27.25,15.25 27.25,14.5 25.5,12.75 L11.1
  Bottom 0.127: v55.25,34.5 47.75,34.5 46.75,35.5 33.5,35.5 32,34 26.5,34 v26.25,34.25
N$9  (via drill 0.3)
  Top 0.127: v51.75,7.75 52.25,8.25 52.25,9.5 53.5,9.5 54,10 54,11.25 53.25,12 C50.1 | v45,8.5 42.5,8.5 42.5,1 40,1 40,4 38.75,5.25 38.75,8.5 39.5,9.25 39.5,15 40.25,15.75 40.25,19.5 40,19.75 v40,22.25 | v26.75,21.75 26.25,22.25 26.25,24 U10.6
  Bottom 0.127: v51.75,7.75 51,8.5 50.5,8.5 50,8 46.25,8 45.75,8.5 v45,8.5 | v40,22.25 39.75,22.5 28.75,22.5 28,21.75 v26.75,21.75
N$11
  Top 0.127: C50.2 51.5,12.25 52.75,13.5 52.75,13.75 R84.1
N$12  (via drill 0.3)
  Top 0.127: C53.1 46.5,13.75 46.5,15.25 C55.1 46.5,15.5 46.5,17 C54.1 46.5,17.25 47.25,18 47.25,22.25 48.75,23.75 48.75,27.5 | 48.75,27.5 51,27.5 C56.1 | v58.25,11.5 58.25,11.25 55.75,11.25 55,12 R70.2 | v38.75,12.25 38.5,12 38.5,10 5V_E.1 | 19,12.75 16.75,12.75 v16.75,13 | 19,12.75 19.25,12.75 L11.2 19,12.75 | v48.75,30 48.75,27.5 | 19,12.75 v19,30.25
  Bottom 0.127: v58.25,11.5 58.75,12 60.5,12 61,11.5 61,10.25 51.5,10.25 49.5,12.25 v38.75,12.25 38,13 37,13 36.75,12.75 17,12.75 v16.75,13 | v48.75,30 30.25,30 30,30.25 v19,30.25
N$13  (via drill 0.3)
  Top 0.127: v54.25,4.75 54,5 54,9.5 54.25,9.75 55.5,9.75 55.75,10 55.75,10.5 56.5,10.5 R92.2 | v11.25,9 10.25,10 10.25,20.25 11.75,21.75 v11.75,31.25 | v43.75,34 45.5,34 45.5,32.75 AM3352-SOM-EVB-PLATFORM.2-21
  Bottom 0.127: v54.25,4.75 53,6 33.5,6 32.75,6.75 13.5,6.75 v11.25,9 | v11.75,31.25 13.5,33 42.75,33 v43.75,34
N$43  (via drill 0.3)
  Top 0.127: v49.5,28.5 49.5,29.25 51,29.25 R47.1 | v47.25,28 46.5,27.25 46.5,25 WAKE-UP.2
  Bottom 0.127: v49.5,28.5 49,28 v47.25,28
N$44  (via drill 0.3)
  Top 0.127: R55.1 46.25,19 46.25,20.75 C48.1 46.25,21 46.25,23.25 v46,23.5 | v50.75,7.75 50.75,8.25 51.25,8.75 R54.2 | v23.75,9 23.25,9.5 23.25,16.25 25.75,18.75 v25.75,21.75 | v44.5,23.75 44.5,29.25 46.25,29.25 WAKE-UP.1
  Bottom 0.127: v50.75,7.75 50,7 33.5,7 32.75,7.75 25,7.75 v23.75,9 | v25.75,21.75 27.5,23.5 44.5,23.5 | v46,23.5 44.5,23.5 | 44.5,23.5 v44.5,23.75
N$62  (via drill 0.3)
  Top 0.127: v52,16.5 52.75,15.75 R85.1 | v57.75,12.75 56.75,12.75 56.75,12.25 R70.1 | v25.5,26.75 25.5,24.75 25,24.25 U10.5 | v45.25,27.5 45,27.25 45,24.25 45.25,24 45.25,23 44.75,22.5 44.75,20.75 45,20.5 45,15.75 44.5,15.25 v44.25,15.25
  Bottom 0.127: v57.75,12.75 59.75,12.75 59.75,16 59.25,16.5 v52,16.5 45.5,16.5 v44.25,15.25 | v25.5,26.75 26.25,27.5 v45.25,27.5
N$80  (via drill 0.3)
  Top 0.127: R41.1 51.25,20.75 51.25,19.25 R40.1 51,19.25 v49.5,19.25 | v32,19.25 28.75,16 28.75,13 29,12.75 U6.8
  Bottom 0.127: v32,19.25 v49.5,19.25
N$99  (via drill 0.3)
  Top 0.127: v57.5,14.75 56.75,15.5 R3.2 | v44.75,14.5 44,13.75 44,11.25 U1.3
  Bottom 0.127: v57.5,14.75 57.25,14.5 v44.75,14.5
N$100  (via drill 0.3)
  Top 0.127: C64.1 53,22.25 54,21.25 54,20 54.5,19.5 54.5,19.25 R1.2 54.75,19 55.5,18.25 55.5,15 56.5,14 C63.1 56.75,13.75 v57.75,13.75 58.25,14.25 58.25,16 59.25,17 60.25,17 60.75,17.5 60.75,19.25 61.5,19.25 L1.2 | v44.75,13.5 45,13.25 45,9.25 44,9.25 U1.1
  Bottom 0.127: v44.75,13.5 45,13.75 v57.75,13.75
N$129  (via drill 0.3)
  Top 0.127: v57.5,25 56.75,24.25 R86.2 | v49.5,22.25 49.75,22 v49.75,20.75 | v61.75,15 61.75,16 PWR_LED.A
  Bottom 0.127: v57.5,25 57.5,24 57.75,24 58.25,23.5 58.25,22.75 58,22.75 57.5,22.25 v49.5,22.25 | v49.75,20.75 51.5,19 58.25,19 61.75,15.5 v61.75,15
N$231
  Top 0.127: LED3.A 59,8.25 57.5,9.75 56,9.75 55,8.75 R48.2
N$266  (via drill 0.3)
  Top 0.127: 4.75,28.25 5.75,27.25 5.75,25.25 6.5,24.5 USB_OTG.GND2 | 4.75,28.25 3,28.25 3,25 2.5,24.5 USB_OTG.GND1 2.5,24.25 2.5,14.5 USB_OTG.GND3 | v58.5,17.25 58.75,17.25 59.5,18 L3.2 | v8.5,16.25 6.75,14.5 USB_OTG.GND4 | 4.75,28.25 5.75,29.25 5.75,30.5 6.75,31.5 10.75,31.5 10.75,33.5 11,33.75 18.5,33.75 18.5,30.75 18.25,30.5 v18.25,16.25
  Bottom 0.127: v58.5,17.25 29.75,17.25 27.75,15.25 18.25,15.25 | 18.25,15.25 14.25,15.25 13.25,16.25 v8.5,16.25 | 18.25,15.25 v18.25,16.25
N$566  (via drill 0.3)
  Top 0.127: v36.25,15.75 36.25,16.5 CAN_T.1 | v60.25,11.25 61.5,12.5 61.5,12.75 R42.1
  Bottom 0.127: v36.25,15.75 37.5,14.5 42.25,14.5 44,12.75 56,12.75 58,10.75 59.75,10.75 v60.25,11.25
P0_12/I2C2_SDA  (via drill 0.3)
  Top 0.127: v23.5,0.75 23.5,1.5 24,2 AM3352-SOM-EVB-PLATFORM.4-8
  Bottom 0.127: v23.5,0.75 21.25,3 7.75,3 2,8.75 CAN1_TX/CAN0_TX1.1 1.75,9 0.75,9 0.75,17.25 1.75,18.25 1.75,26.75 CAN1_TX/CAN0_TX.1
P0_13/I2C2_SCL
  Top 0.127: AM3352-SOM-EVB-PLATFORM.4-7 24,6 23.5,5.5 23.5,5.25 21.5,3.25 21,3.25 21,1.25 20.25,0.5 3,0.5 3,9.75 2,10.75 2,11.5 CAN1_RX/CAN0_RX.1
  Bottom 0.127: CAN1_RX/CAN0_RX1.1 2,29.75 2,28.25 2.75,28.25 3,28 3,19 2,18 2,11.75 CAN1_RX/CAN0_RX.1
P1_8/UART4_RXD  (via drill 0.3)
  Top 0.127: AM3352-SOM-EVB-PLATFORM.4-14 20.25,2 19.75,1.5 19.75,1.25 19.5,1 7,1 7,8.75 CAN1_TX/CAN0_TX1.3 6.75,9 5.75,10 v5.75,12.5
  Bottom 0.127: v5.75,12.5 5,13.25 3.25,13.25 3.25,18.25 5.25,20.25 6.75,20.25 6.75,26.75 CAN1_TX/CAN0_TX.3
P1_9/UART4_TXD  (via drill 0.3)
  Top 0.127: v16.25,26.75 16,26.5 16,9.25 18,9.25 19.75,7.5 19.75,6.75 20.25,6.25 AM3352-SOM-EVB-PLATFORM.4-13 | CAN1_RX/CAN0_RX.3 7,11.75 9.25,11.75 9.25,27.5 7,29.75 CAN1_RX/CAN0_RX1.3
  Bottom 0.127: v16.25,26.75 15.25,27.75 9,27.75 7,29.75 CAN1_RX/CAN0_RX1.3
P3_8/EMU1  (1 unrouted)
  Top 0.127: R7.2 53,17.5 53,19 R40.2
P3_20/LED2  (via drill 0.3)
  Top 0.127: v49.5,11.25 52,11.25 52.25,11 52.25,10.75 53,10.75 R49.1 | v34.25,14 v34.25,11.5 | v15.25,14.25 14.5,13.5 14.5,6.75 14,6.25 AM3352-SOM-EVB-PLATFORM.4-23
  Bottom 0.127: v49.5,11.25 49.25,11.5 v34.25,11.5 | v34.25,14 34,13.75 23.25,13.75 22.75,14.25 v15.25,14.25
P3_21/LED3  (via drill 0.3)
  Top 0.127: v55.5,7.75 56.5,8.75 R48.1 | v18.5,7.75 18.5,5.25 16.5,3.25 14,3.25 14,2.25 AM3352-SOM-EVB-PLATFORM.4-24
  Bottom 0.127: v55.5,7.75 54.25,6.5 33.5,6.5 32.75,7.25 19,7.25 v18.5,7.75
SYS_RESETN  (via drill 0.3)
  Top 0.127: v46,4.75 46.75,5.5 46.75,6 AM3352-SOM-EVB-PLATFORM.3-21 | AM3352-SOM-EVB-PLATFORM.4-28 11.5,2.25 12,2.75 v12,4.5 12,9.25 10.75,10.5 10.75,12.75 12.75,12.75 15.5,15.5 15.5,27.75 v17.25,29.5 | v46.5,34.25 46.5,36.25 46.75,36.5 AM3352-SOM-EVB-PLATFORM.2-24
  Bottom 0.127: v12,4.5 13,5.5 33,5.5 33.5,5 45.75,5 v46,4.75 | v46.5,34.25 44.5,32.25 20,32.25 v17.25,29.5
USB0-DRV  (via drill 0.3)
  Top 0.127: R4.2 56.75,17.5 57.75,17.5 58.25,18 v58.25,21.5 58.25,25.25 57.75,25.75 56.75,25.75 R2.1 | v41.25,3.75 41.25,7.5 40.5,8.25 40.5,10.25 41.25,11 U1.4 | v43.25,3.75 43.75,3.25 43.75,1.25 44.5,0.5 50.75,0.5 50.75,2 AM3352-SOM-EVB-PLATFORM.3-16 | v36.25,20.75 35.5,20 35.5,7.75 34.5,6.75 v34.5,4.25
  Bottom 0.127: v43.25,3.75 v41.25,3.75 41,3.5 35.25,3.5 v34.5,4.25 | v58.25,21.5 48,21.5 47.25,20.75 v36.25,20.75
USB0-ID  (via drill 0.3)
  Top 0.127: v52.75,0.75 52.75,1.5 53.25,2 AM3352-SOM-EVB-PLATFORM.3-12 | v25.25,0.75 24.75,1.25 24.75,7.25 23.75,8.25 21.75,8.25 v21.75,16 | v5.25,19.25 5.75,18.75 6.75,18.75 USB_OTG.ID
  Bottom 0.127: v52.75,0.75 52.5,0.5 25.5,0.5 v25.25,0.75 | v21.75,16 18,19.75 5.75,19.75 v5.25,19.25
USB0-VBUS  (via drill 0.3)
  Top 0.127: v57.5,18.25 56.75,19 R1.1 | v53.75,4 53.5,4.25 53.5,6 AM3352-SOM-EVB-PLATFORM.3-11
  Bottom 0.127: v57.5,18.25 57.75,18 58.75,18 61,15.75 61,12 61.5,11.5 61.5,5.5 56,5.5 54.5,4 v53.75,4
USB0_CE  (via drill 0.3)
  Top 0.127: v57.75,27.25 57.75,26.75 56,26.75 55.75,26.5 55.75,26 54.75,26 R2.2 | v33.5,30.75 33,30.25 v33,25.5 | v11,24 9.75,22.75 v9.75,9 | v51.5,3.75 52,3.25 52,2.25 AM3352-SOM-EVB-PLATFORM.3-14
  Bottom 0.127: v57.75,27.25 54.25,30.75 v33.5,30.75 | v33,25.5 32.5,25 14.75,25 13.75,24 v11,24 | v9.75,9 12.75,6 33,6 33.5,5.5 48,5.5 49.75,3.75 v51.5,3.75
USB0_DM  (via drill 0.3)
  Top 0.127: v45,3.75 45,1 50,1 50.25,1.25 50.25,3.25 50.75,3.75 50.75,6 AM3352-SOM-EVB-PLATFORM.3-15 | v13.75,4.75 13.25,5.25 13.25,9.75 14,10.5 14,12.25 v13.75,12.5 | v5.25,18.25 4.5,19 4.5,19.5 5,20 6.75,20 USB_OTG.D-
  Bottom 0.127: v45,3.75 44.25,3 22.25,3 20.5,4.75 v13.75,4.75 | v13.75,12.5 13,13.25 10.25,13.25 v5.25,18.25
USB0_DP  (1 unrouted)
VCC  (via drill 0.3)
  Top 0.127: AM3352-SOM-EVB-PLATFORM.4-3 26.75,6 27.25,5.5 27.25,5.25 27.5,5 29.75,5 29.75,8.5 30,8.75 31.75,8.75 U6.3 31.75,4.25 33.75,2.25 | v57.75,0.75 57.75,5.5 58.25,6 AM3352-SOM-EVB-PLATFORM.3-3 | 33.75,2.25 v34.5,1.5 | R47.2 53,29.5 54,30.5 54,34.25 55.25,35.5 57.75,35.5 v57.75,34 57.75,30.5 56.75,29.5 C47.1 | v57.5,23.25 57.5,20 55.75,20 55.75,20.5 54.75,20.5 C1.1 | 34.25,31 34.25,32.5 AM3352-SOM-EVB-PLATFORM.2-3 34.5,32.75 34.5,34 v34.75,34.25 | 34.25,31 v34.25,25 | v5.75,34 5.75,33.25 5.25,32.75 AM3352-SOM-EVB-PLATFORM.1-3 | 34.25,31 36.5,31 37,30.5 37,20.5 36,19.5 36,17.75 38.25,17.75 U2.3 38.5,17.5 39,17.5 39.75,16.75 39.75,15.75 39,15 39,13.75 38,12.75 38,11.5 36.75,11.5 36,10.75 36,9 36.25,8.75 36.25,5.25 35.5,4.5 35.5,4 33.75,2.25
  Bottom 0.127: v57.75,0.75 57,1.5 v34.5,1.5 | v57.5,23.25 56,24.75 49.25,24.75 49,25 v34.25,25 | v5.75,34 6.25,33.5 34,33.5 v34.75,34.25 35.5,35 46.75,35 48,33.75 57.5,33.75 v57.75,34

## Text on the board
tNames: TX | RX | GND | B | B | +
bNames: 2 | 4 | 6 | 8 | 10 | 12 | 14 | 16 | 18 | 20 | 22 | 24 | 26 | 28 | 30 | 32 | 34 | 36 | 38 | 40 | 2 | 4 | 6 | 8 | 10 | 12 | 14 | 16 | 18 | 20 | 1 | 3 | 5 | 7 | 9 | 11 | 13 | 15 | 17 | 19 | 21 | 23 | 25 | 27 | 29 | 31 | 33 | 35 | 37 | 39 | 1 | 3 | 5 | 7 | 9 | 11 | 13 | 15 | 17 | 19 | GND | D+ | D- | +5V | AM3352-SOM-EVB | GND | D+ | D- | +5V | Rev.D | DESCRIPTION | STATE | JUMPER | GND | D+ | D- | +5V | USB power supply is disabled (default) | USB_PWR_E | USB power supply is enabled | 5V power supply is disabled | 5V_E | 5V power supply is enabled (default) | GND | D+ | D- | +5V | USB1_DRV is disabled | HOST_DRV | USB1_DRV is enabled (default) | CAN_T is disabled (default) | CAN_T | CAN_T is enabled | CAN1_TX/CAN0_TX | CAN0 is selected | CAN1_RX/CAN0_RX | CAN1_TX/CAN0_TX | CAN1 is selected (default) | CAN1_RX/CAN0_RX | GND | CAN_L | TX | RX | GND | CAN_H | 6-16VDC | + | - | 2 | 4 | 6 | 8 | 10 | 12 | 14 | 16 | 18 | 20 | 22 | 24 | 26 | 28 | 30 | 32 | 34 | 36 | 38 | 40 | 2 | 4 | 6 | 8 | 10 | 2 | 4 | 6 | 8 | 10 | 1 | 3 | 5 | 7 | 9 | 11 | 13 | 15 | 17 | 19 | 21 | 23 | 25 | 27 | 29 | 31 | 33 | 35 | 37 | 39 | 1 | 3 | 5 | 7 | 9 | 1 | 3 | 5 | 7 | 9